# EAGLE board tda7266-7x7w (EAGLE 6.2)
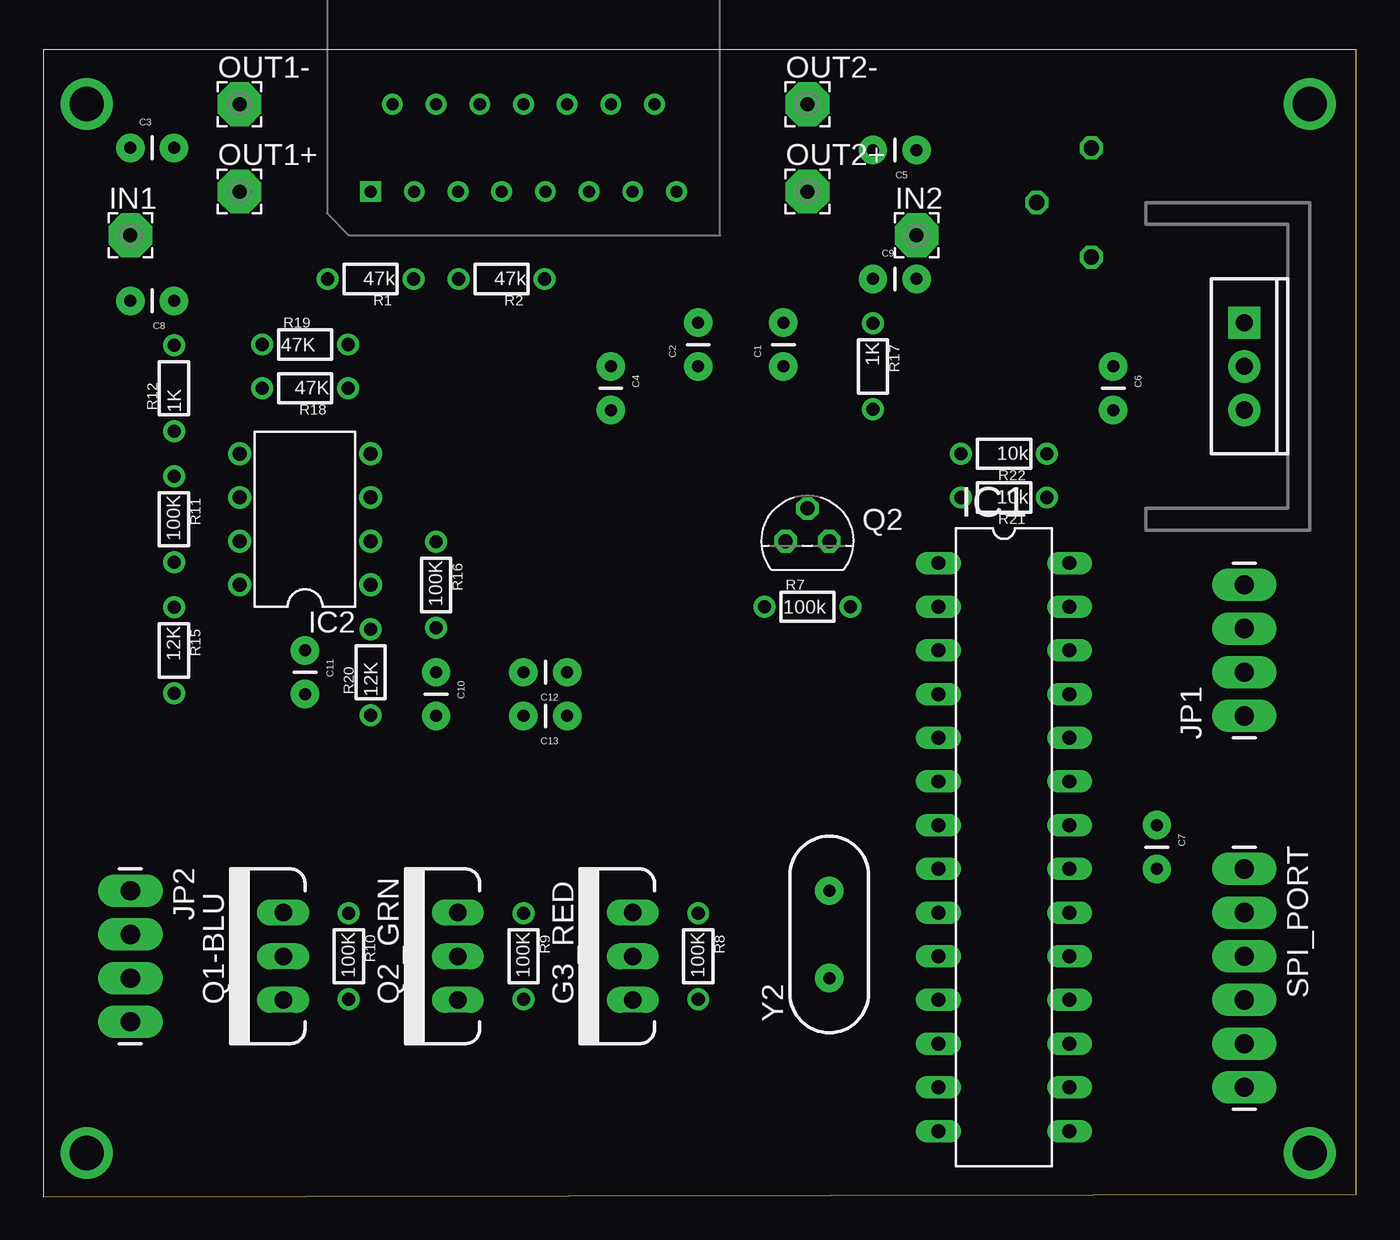
[diagram p0: board, top side]
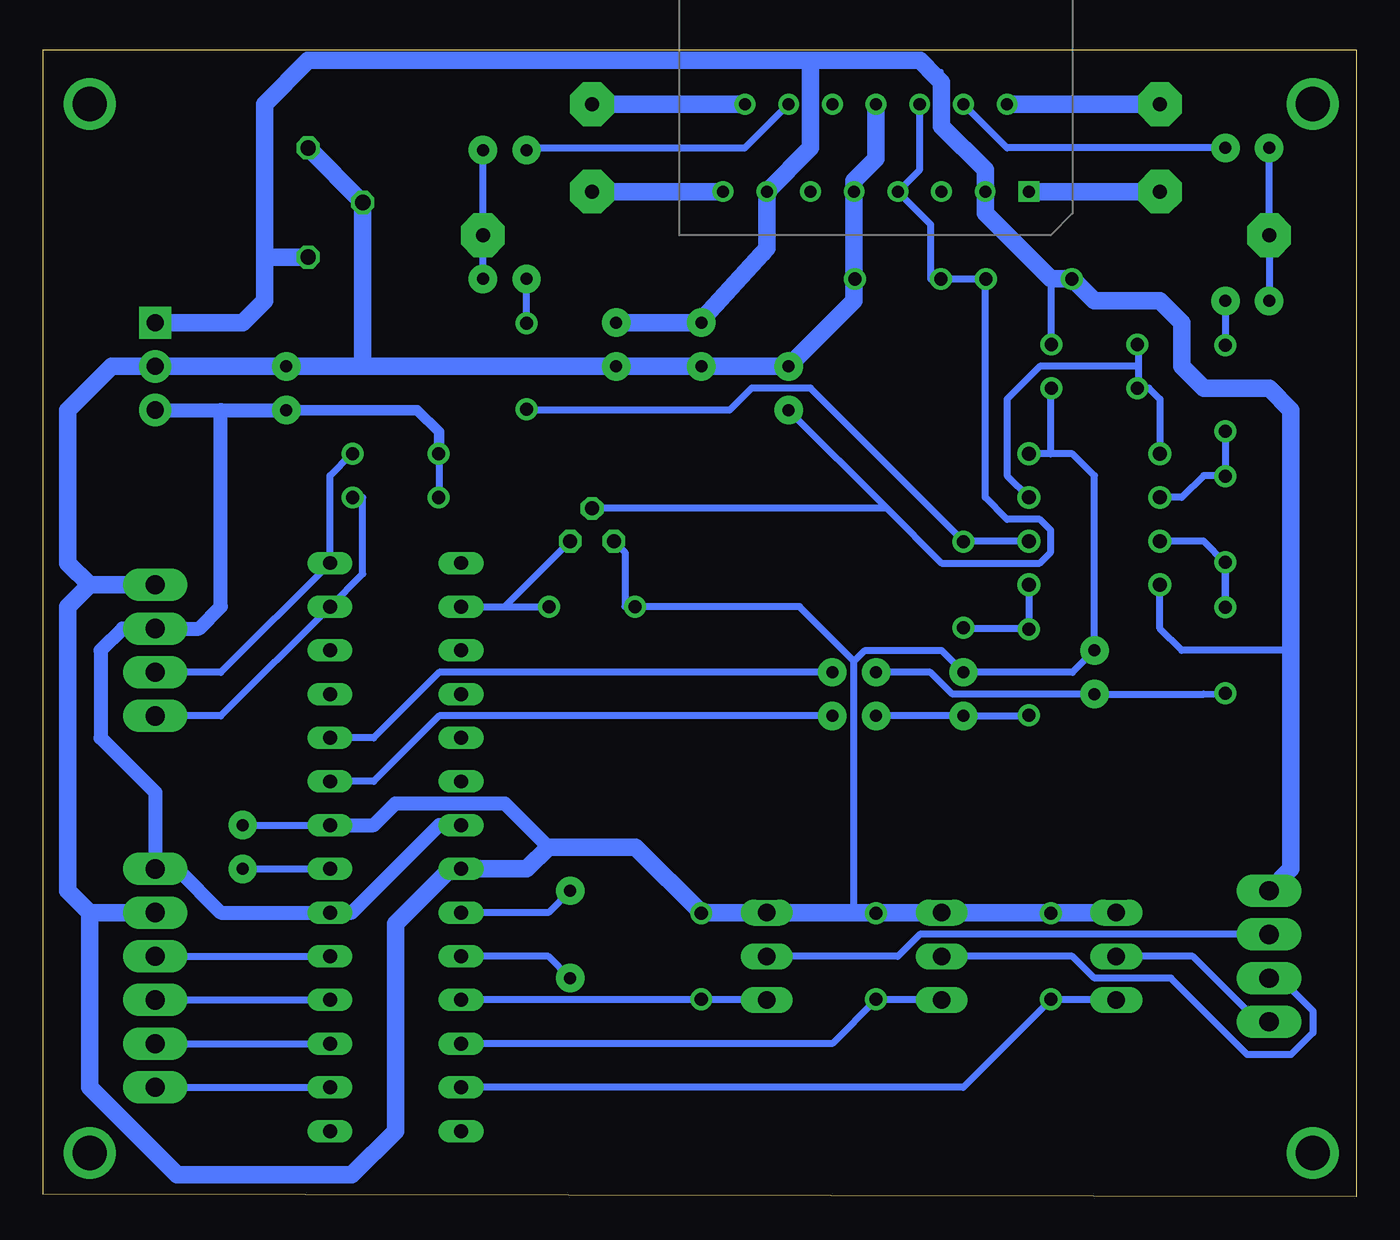
[diagram p1: board, bottom side, seen from below]

Size 76.38 x 66.67 mm. Coordinates in mm from the lower left corner, seen from the top.
Outline: 0,0 76.38,0.13 76.38,66.67 0,66.67 0,0
Copper layers (1*16): Top 0.035mm / dielectric 1.5mm / Bottom 0.035mm
Design rules: minimum track width 16mil, minimum drill 24mil, track to track 8mil, track to pad 8mil, pad to pad 8mil, via to via 8mil, smd to smd 8mil, copper to edge 40mil, drill to drill 8mil, minimum pad ring 10mil, minimum via ring 8mil, stop-mask expansion 4mil, vias tented up to drill 0mil, thermal gap 10mil

## Footprints (pad centres in the part's own frame; a part is rotated, then mirrored left to right if it is on the bottom)
CAP-PTH-SMALL = drill 0.7 pad 1.651: 1 0,0; 2 2.54,0
TO220V = drill 1.016 long: 1 -2.54,0; 2 0,0; 3 2.54,0
DIL28-3 = drill 0.813 long: 1 -16.51,-3.81; 2 -13.97,-3.81; 3 -11.43,-3.81; 4 -8.89,-3.81; 5 -6.35,-3.81; 6 -3.81,-3.81; 7 -1.27,-3.81; 8 1.27,-3.81; 9 3.81,-3.81; 10 6.35,-3.81; 11 8.89,-3.81; 12 11.43,-3.81; 13 13.97,-3.81; 14 16.51,-3.81; 15 16.51,3.81; 16 13.97,3.81; 17 11.43,3.81; 18 8.89,3.81; 19 6.35,3.81; 20 3.81,3.81; 21 1.27,3.81; 22 -1.27,3.81; 23 -3.81,3.81; 24 -6.35,3.81; 25 -8.89,3.81; 26 -11.43,3.81; 27 -13.97,3.81; 28 -16.51,3.81
DIL08 = drill 0.813 pad 1.27: 1 -3.81,-3.81; 2 -1.27,-3.81; 3 1.27,-3.81; 4 3.81,-3.81; 5 3.81,3.81; 6 1.27,3.81; 7 -1.27,3.81; 8 -3.81,3.81
2,54/0,8 = drill 0.813 pad 2.54 octagon: 1 0,0
1X04_LONGPADS = drill 1.118 pad 1.88 long: 1 0,0; 2 2.54,0; 3 5.08,0; 4 7.62,0
TO92 = drill 0.813 octagon: 1 1.27,0; 2 0,1.905; 3 -1.27,0
1/6W-RES = drill 0.762: 1 -2.5,0; 2 2.5,0
1X06_LONGPADS = drill 1.118 pad 1.88 long: 1 0,0; 2 2.54,0; 3 5.08,0; 4 7.62,0; 5 10.16,0; 6 12.7,0
MULTIWATT-15 = drill 0.7 square: 1 -8.89,-2.54 | drill 0.7: 2 -7.62,2.54; 3 -6.35,-2.54; 4 -5.08,2.54; 5 -3.81,-2.54; 6 -2.54,2.54; 7 -1.27,-2.54; 8 0,2.54; 9 1.27,-2.54; 10 2.54,2.54; 11 3.81,-2.54; 12 5.08,2.54; 13 6.35,-2.54; 14 7.62,2.54; 15 8.89,-2.54
TO220-IGO = drill 1 pad 1.88: GND 0,0; OUT 2.54,0 | drill 1 pad 1.88 square: IN -2.54,0
HC49US = drill 0.7 pad 1.651: 1 -2.54,0; 2 2.54,0

## Placement (x,y rotation side)
C1  470uF  [CAP-PTH-SMALL]  43.05,48.26 90 top
C2  100nF  [CAP-PTH-SMALL]  38.1,48.26 90 top
C3  22uF  [CAP-PTH-SMALL]  5.08,60.96 0 top
C4  10uF  [CAP-PTH-SMALL]  33.02,48.26 270 top
C5  22uF  [CAP-PTH-SMALL]  50.8,60.83 180 top
C6  10uF  [CAP-PTH-SMALL]  62.23,48.26 270 top
C7  1uF  [CAP-PTH-SMALL]  64.77,21.59 270 top
C8  1uF  [CAP-PTH-SMALL]  7.62,52.07 180 top
C9  1uF  [CAP-PTH-SMALL]  48.26,53.34 0 top
C10  4n7  [CAP-PTH-SMALL]  22.86,30.48 270 top
C11  4n7  [CAP-PTH-SMALL]  15.24,31.75 270 top
C12  1uF  [CAP-PTH-SMALL]  30.48,30.48 180 top
C13  1uF  [CAP-PTH-SMALL]  30.48,27.94 180 top
G3_RED  [TO220V]  34.29,13.97 90 top
IC1  ATMEGA8-PU  [DIL28-3]  55.88,20.32 270 top
IC2  LM1458N  [DIL08]  15.24,39.37 90 top
IN1  [2,54/0,8]  5.08,55.88 0 top
IN2  [2,54/0,8]  50.8,55.88 0 top
JP1  TWI_HDR  [1X04_LONGPADS]  69.85,27.94 90 top
JP2  LED_HDR  [1X04_LONGPADS]  5.08,17.78 270 top
OUT1+  [2,54/0,8]  11.43,58.42 0 top
OUT1-  [2,54/0,8]  11.43,63.5 0 top
OUT2+  [2,54/0,8]  44.45,58.42 0 top
OUT2-  [2,54/0,8]  44.45,63.5 0 top
Q1-BLU  [TO220V]  13.97,13.97 90 top
Q2  BSS296  [TO92]  44.45,38.1 0 top
Q2_GRN  [TO220V]  24.13,13.97 90 top
R1  47k  [1/6W-RES]  19.05,53.34 180 top
R2  47k  [1/6W-RES]  26.67,53.34 180 top
R7  100k  [1/6W-RES]  44.45,34.29 0 top
R8  100K  [1/6W-RES]  38.1,13.97 270 top
R9  100K  [1/6W-RES]  27.94,13.97 270 top
R10  100K  [1/6W-RES]  17.78,13.97 270 top
R11  100K  [1/6W-RES]  7.62,39.37 270 top
R12  1K  [1/6W-RES]  7.62,46.99 90 top
R15  12K  [1/6W-RES]  7.62,31.75 270 top
R16  100K  [1/6W-RES]  22.86,35.56 270 top
R17  1K  [1/6W-RES]  48.26,48.26 270 top
R18  47K  [1/6W-RES]  15.24,46.99 180 top
R19  47K  [1/6W-RES]  15.24,49.53 0 top
R20  12K  [1/6W-RES]  19.05,30.48 90 top
R21  10k  [1/6W-RES]  55.88,40.64 180 top
R22  10k  [1/6W-RES]  55.88,43.18 180 top
SPI_PORT  [1X06_LONGPADS]  69.85,19.05 270 top
U1  TDA7266  [MULTIWATT-15]  27.94,60.96 0 top
U2  7807  [TO220-IGO]  69.85,48.26 270 top
Y2  [HC49US]  45.72,15.24 90 top

## Library data of the parts
C1-C13 G3_RED JP1 JP2 Q1-BLU Q2_GRN R1 R2 R7-R12 R15-R22 SPI_PORT U2 Y2 = SparkFun
IC1 = atmega8
IC2 = linear
IN1 IN2 OUT1+ OUT1- OUT2+ OUT2- = wirepad
Q2 = transistor-fet
U1 = Synapseware

## Nets
5V: C6.2 IC1.7 IC1.20 JP1.3 R21.2 R22.2 SPI_PORT.1 U2.OUT
/SCK: IC1.19 SPI_PORT.3
/SS: IC1.16 SPI_PORT.6
AUD_CTRL: IC1.2 Q2.1 R7.2
AUDIO_1: C13.1 IC1.23
AUDIO_2: C12.1 IC1.24
BLU: IC1.13 Q1-BLU.1 R10.2
BLU_OUT: JP2.4 Q1-BLU.2
GND: C1.1 C2.1 C4.1 C6.1 C7.1 C10.1 C11.1 G3_RED.3 IC1.8 IC1.22 IC2.4 JP1.4 Q1-BLU.3 Q2.3 Q2_GRN.3 R2.1 R7.1 R8.1 R9.1 R10.1 R18.1 SPI_PORT.2 U1.8 U1.9 U2.GND
GRN: IC1.12 Q2_GRN.1 R9.2
GRN_OUT: JP2.3 Q2_GRN.2
IN1: C3.1 C8.2 IN1.1
IN2: C5.1 C9.2 IN2.1
MISO: IC1.18 SPI_PORT.4
MOSI: IC1.17 SPI_PORT.5
N$1: IC2.1 R16.2 R20.2
N$3: IC1.9 Y2.2
N$5: C8.1 R12.2
N$6: IC1.10 Y2.1
N$7: C11.2 C12.2 R15.2
N$11: C3.2 U1.4
N$13: C5.2 U1.12
N$14: C7.2 IC1.21
N$15: IC2.2 R16.1 R17.2
N$16: C9.1 R17.1
N$19: C10.2 C13.2 R20.1
N$25: IC2.7 R11.2 R15.1
N$27: IC2.6 R11.1 R12.1
N$262344: C4.2 Q2.2 R1.1 R2.2 U1.6 U1.7
OUT1+: OUT1+.1 U1.1
OUT1-: OUT1-.1 U1.2
OUT2+: OUT2+.1 U1.15
OUT2-: OUT2-.1 U1.14
RED: G3_RED.1 IC1.11 R8.2
RED_OUT: G3_RED.2 JP2.2
SCL: IC1.28 JP1.2 R22.1
SDA: IC1.27 JP1.1 R21.1
V_DIV: IC2.3 IC2.5 R18.2 R19.1
VCC: C1.2 C2.2 IC2.8 JP2.1 R1.2 R19.2 U1.3 U1.13 U2.IN

## Tracks (layer width: path | path; a pad name or v marks a point on that pad's centre or on a via)
5V
  Bottom 0.406: R21.2 53.34,40.64 53.34,43.18 R22.2 | JP1.3 70.48,33.02
  Bottom 0.61: C6.2 54.61,45.72 53.34,44.45 53.34,43.18
  Bottom 0.813: 66.04,45.72 66.04,34.29 67.31,33.02 JP1.3 71.75,33.02 73.03,31.75 73.03,26.67 69.85,23.5 SPI_PORT.1 68.58,19.05 66.04,16.51 IC1.20 58.42,16.51 53.34,21.59 IC1.7 | U2.OUT 66.04,45.72 | 66.04,45.72 C6.2
/SCK
  Bottom 0.406: SPI_PORT.3 IC1.19
/SS
  Bottom 0.406: SPI_PORT.6 IC1.16
AUD_CTRL
  Bottom 0.406: IC1.2 49.53,34.29 | 49.53,34.29 R7.2 | 49.53,34.29 Q2.1
AUDIO_1
  Bottom 0.406: IC1.23 57.15,24.13 53.34,27.94 C13.1
AUDIO_2
  Bottom 0.406: IC1.24 57.15,26.67 53.34,30.48 C12.1
BLU
  Bottom 0.406: Q1-BLU.1 17.78,11.43 | IC1.13 22.86,6.35 17.78,11.43 | 17.78,11.43 R10.2
BLU_OUT
  Bottom 0.406: Q1-BLU.2 9.53,13.97 5.71,10.16 JP2.4
GND  (via drill 0.9)
  Bottom 0.254: v57.78,57.78 57.78,57.66
  Bottom 0.406: 29.21,53.34 R2.1 | 17.78,43.18 17.78,46.99 R18.1 | C10.1 16.51,30.48 C11.1 15.24,41.91 16.51,43.18 17.78,43.18 | 17.78,43.18 IC2.4 | 17.78,16.51 R10.1 | C7.1 IC1.22 | 38.1,16.51 R8.1 | 27.94,16.51 R9.1 | 23.5,30.48 C10.1 | 29.21,31.11 28.57,31.75 24.13,31.75 C10.1 | 29.21,16.51 29.21,31.11 | Q2.3 42.55,37.47 42.55,34.29 R7.1 32.38,34.29 29.21,31.11
  Bottom 0.813: IC1.22 57.15,21.59 55.88,22.86 49.53,22.86 46.99,20.32
  Bottom 1.016: U1.8 27.94,60.33 29.21,59.05 U1.9 29.21,53.34 29.21,52.07 C4.1 C2.1 C1.1 C6.1 | v57.78,57.78 v60.96,60.96 | 57.78,48.26 57.88,48.31 57.78,48.39 | 57.78,48.26 57.78,48.39 | 57.78,48.39 57.78,57.66 | 57.78,48.26 C6.1 | C6.1 U2.GND 72.39,48.26 74.93,45.72 74.93,36.83 73.66,35.56 | JP1.4 73.66,35.56 | 73.66,35.56 74.93,34.29 74.93,17.78 73.66,16.51 | 73.66,16.51 SPI_PORT.2 | 73.66,16.51 73.66,6.35 68.58,1.27 58.42,1.27 55.88,3.81 55.88,15.88 52.83,18.92 52.2,18.92 IC1.8 48.26,19.05 46.99,20.32 41.91,20.32 38.1,16.51 G3_RED.3 29.21,16.51 27.94,16.51 Q2_GRN.3 17.78,16.51 Q1-BLU.3
GRN
  Bottom 0.406: Q2_GRN.1 27.94,11.43 | IC1.12 30.48,8.89 27.94,11.43 | 27.94,11.43 R9.2
GRN_OUT
  Bottom 0.406: Q2_GRN.2 16.51,13.97 15.24,12.7 10.79,12.7 6.35,8.26 3.81,8.26 2.54,9.53 2.54,10.79 4.45,12.7 JP2.3
IN1
  Bottom 0.406: C3.1 IN1.1 C8.2
IN2
  Bottom 0.406: C5.1 IN2.1 C9.2
MISO
  Bottom 0.406: SPI_PORT.4 IC1.18
MOSI
  Bottom 0.406: SPI_PORT.5 IC1.17
N$1
  Bottom 0.406: IC2.1 19.05,33.02 | 19.05,33.02 22.86,33.02 R16.2 | 19.05,33.02 R20.2
N$3
  Bottom 0.406: IC1.9 46.99,16.51 Y2.2
N$5
  Bottom 0.406: C8.1 R12.2
N$6
  Bottom 0.406: IC1.10 46.99,13.97 Y2.1
N$7
  Bottom 0.406: R15.2 8.89,29.21 C11.2 23.5,29.21 24.77,30.48 C12.2
N$8  (via drill 2)
  other vias: 2.54,63.5
N$9  (via drill 2)
  other vias: 73.66,63.5
N$10  (via drill 2)
  other vias: 2.54,2.54
N$11
  Bottom 0.406: U1.4 20.32,60.96 C3.2
N$12  (via drill 2)
  other vias: 73.66,2.54
N$13
  Bottom 0.406: U1.12 35.56,60.96 48.26,60.96 C5.2
N$14
  Bottom 0.406: C7.2 IC1.21
N$15
  Bottom 0.406: IC2.2 22.86,38.1 | 22.86,38.1 31.75,46.99 35.18,46.99 36.45,45.72 48.26,45.72 R17.2 | 22.86,38.1 R16.1
N$16
  Bottom 0.406: R17.1 C9.1
N$19
  Bottom 0.406: R20.1 19.05,27.94 C10.2 C13.2
N$25
  Bottom 0.406: R11.2 7.62,34.29 | 7.62,34.29 7.62,36.83 8.89,38.1 IC2.7 | 7.62,34.29 R15.1
N$27
  Bottom 0.406: 7.62,44.45 R11.1 | 7.62,44.45 7.62,41.91 8.89,41.91 10.16,40.64 IC2.6 | 7.62,44.45 R12.1
N$262344
  Bottom 0.406: U1.6 25.4,59.69 U1.7 24.77,56.52 24.77,53.34 R2.2 21.59,53.34 | 21.59,53.34 21.59,40.64 20.32,39.37 18.41,39.37 17.78,38.73 17.78,37.47 18.41,36.83 24.13,36.83 27.3,40.01 | C4.2 27.3,40.01 | 21.59,53.34 R1.1 | 27.3,40.01 Q2.2
OUT1+
  Bottom 1.016: U1.1 OUT1+.1
OUT1-
  Bottom 1.016: OUT1-.1 U1.2
OUT2+
  Bottom 1.016: U1.15 OUT2+.1
OUT2-
  Bottom 1.016: U1.14 OUT2-.1
RED
  Bottom 0.406: G3_RED.1 38.1,11.43 | 38.1,11.43 IC1.11 | 38.1,11.43 R8.2
RED_OUT
  Bottom 0.406: G3_RED.2 26.67,13.97 25.4,15.24 JP2.2
SCL
  Bottom 0.406: R22.1 58.42,43.18 59.69,41.91 IC1.28 66.04,30.48 JP1.2
SDA
  Bottom 0.406: R21.1 57.78,40.64 57.78,36.2 IC1.27 66.04,27.94 JP1.1
V_DIV
  Bottom 0.406: 12.7,48.26 12.7,49.53 R19.1 | 12.7,48.26 12.7,46.99 R18.2 12.06,46.99 11.43,46.35 IC2.5 | IC2.3 20.32,41.91 20.32,46.35 18.41,48.26 12.7,48.26
VCC  (via drill 0.9)
  Bottom 0.254: 24.13,65.41 24.45,65.09
  Bottom 0.406: 34.29,54.61 34.29,55.12 | 17.78,53.34 17.78,49.53 R19.2 | 3.81,27.94 3.81,31.75 10.16,31.75 11.43,33.02 IC2.8
  Bottom 1.016: 31.75,66.04 25.4,66.04 24.45,65.09 24.13,64.77 24.13,62.23 21.59,59.69 U1.3 21.59,57.15 17.78,53.34 R1.2 16.51,53.34 15.24,52.07 11.43,52.07 10.16,50.8 10.16,48.26 8.89,46.99 5.08,46.99 3.81,45.72 3.81,27.94 3.81,19.05 JP2.1 | 31.75,66.04 31.75,60.96 U1.13 34.29,55.12 38.23,50.8 C2.2 C1.2 | 63.5,54.61 63.5,63.5 60.96,66.04 31.75,66.04 | v60.96,54.61 63.5,54.61 | 63.5,54.61 63.5,52.07 64.77,50.8 U2.IN